# Altium PCB Basic diff probe.PcbDoc
Units mm, origin at the board's own origin, x right, y up, seen from the top; angles counter-clockwise.
Board outline 45 x 23 mm, 2 copper layers (Top Layer, Bottom Layer); 10 components, 13 nets, 32 pads, 1 vias.
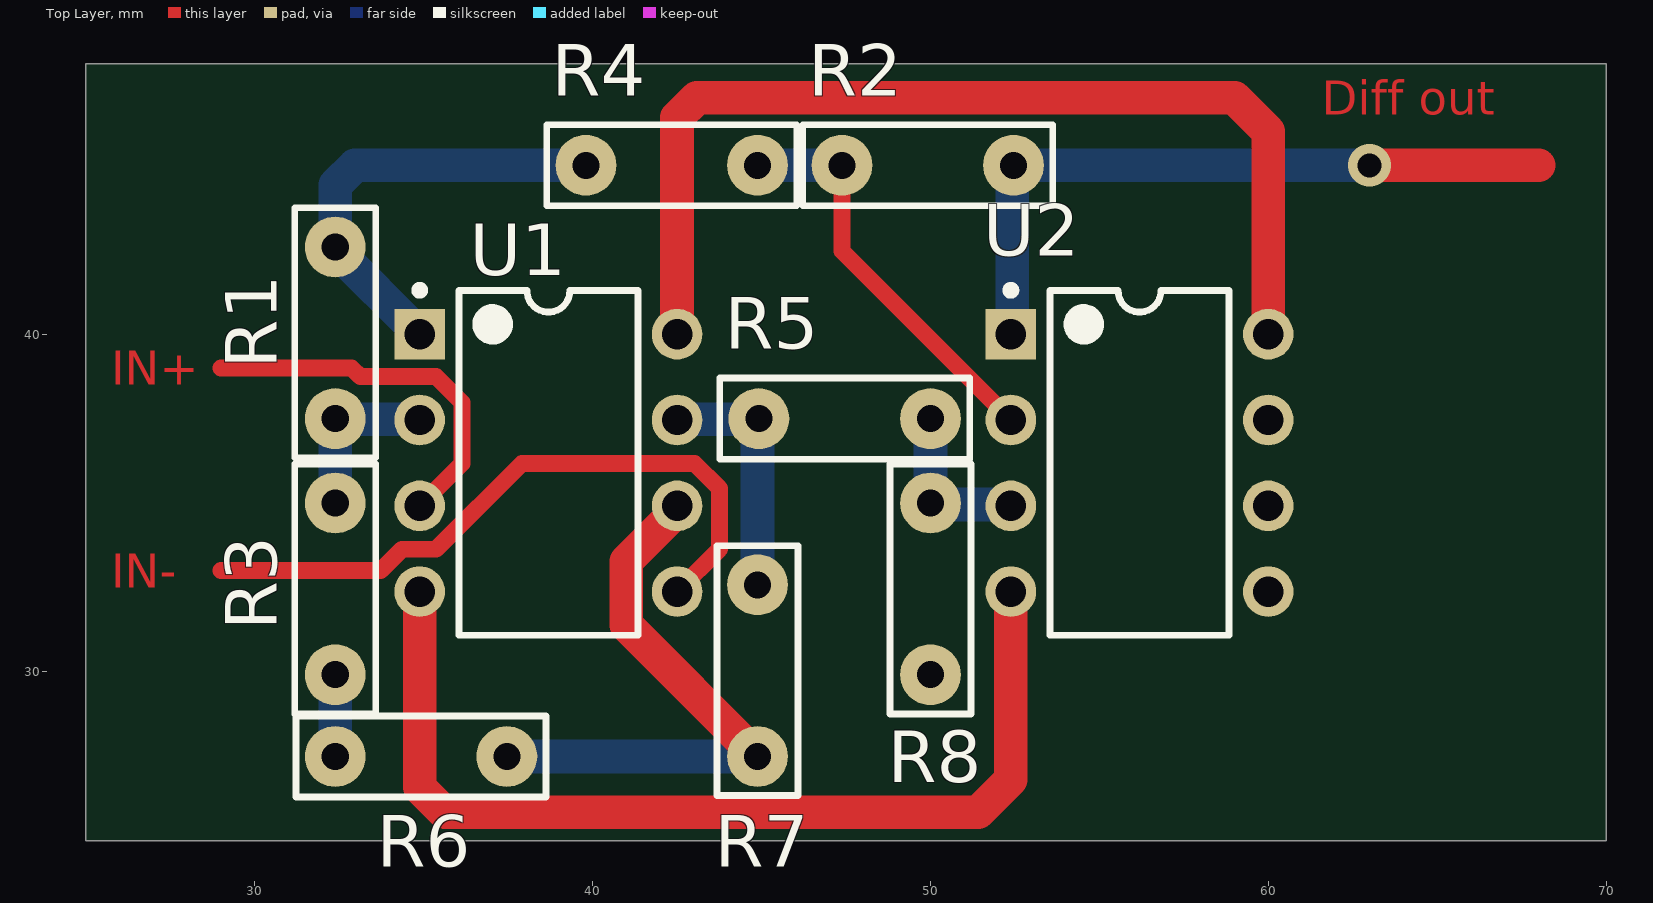
[diagram p0: Top Layer view]
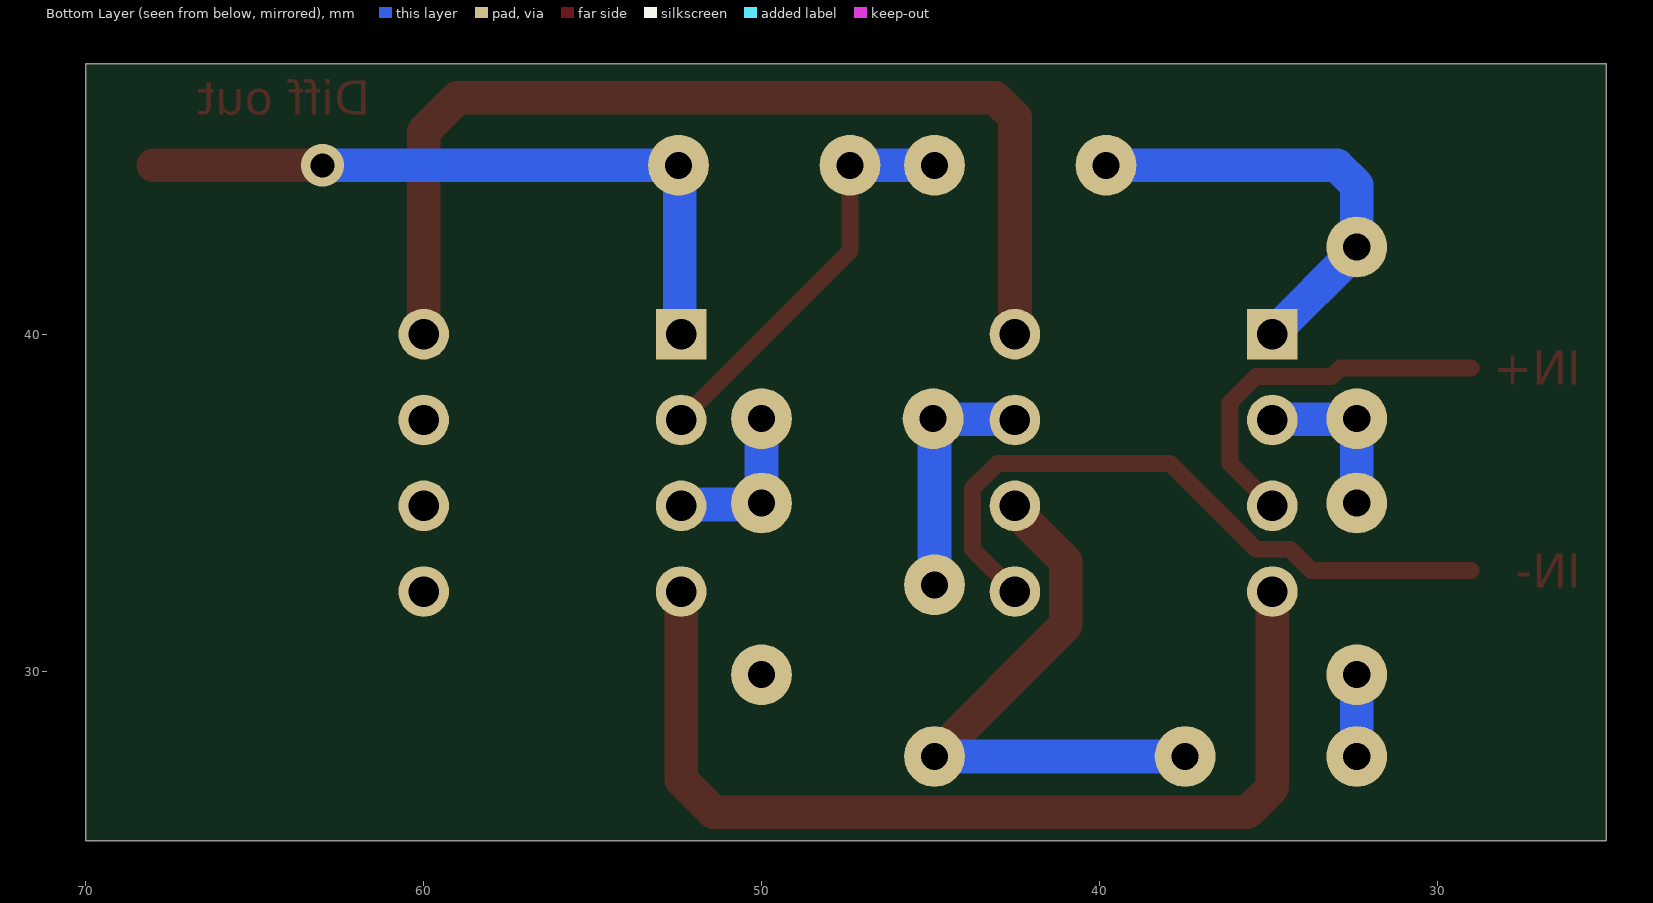
[diagram p1: Bottom Layer view, seen from below]
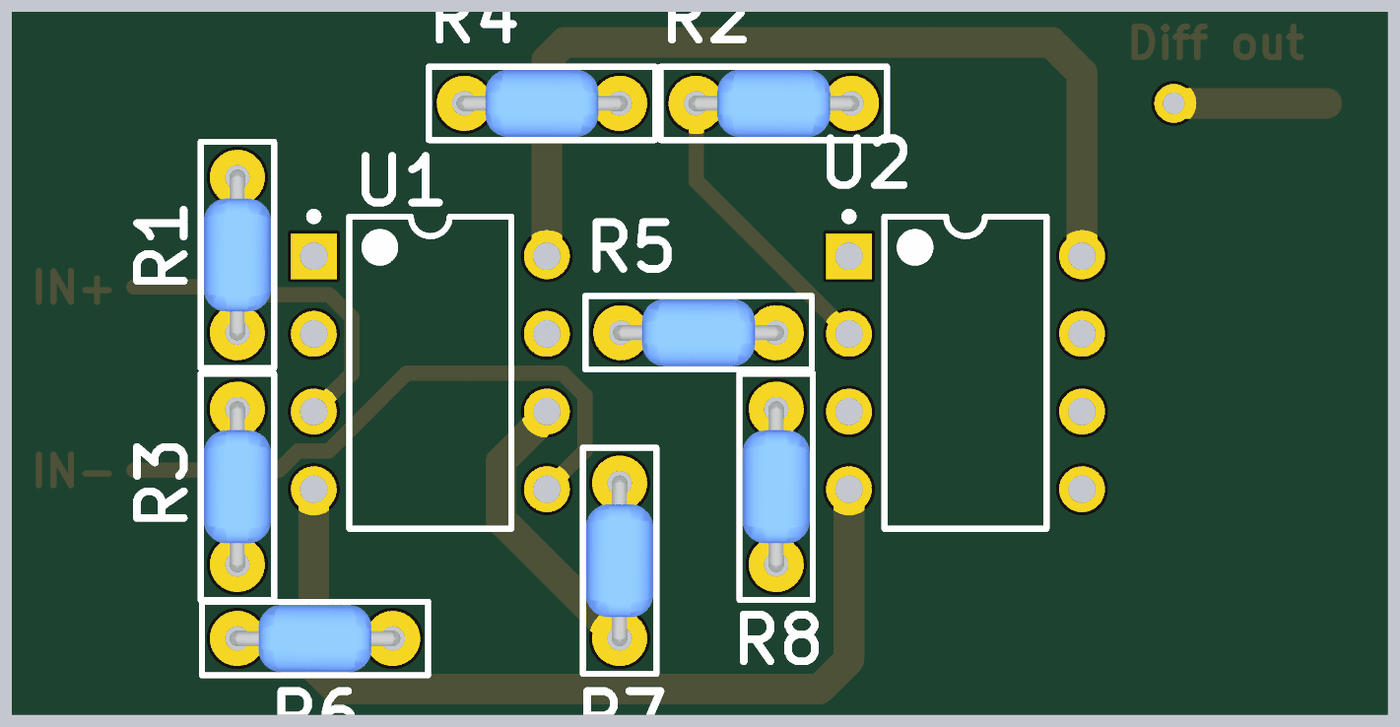
[diagram p2: 3D render of the assembled board from above, using the file's embedded part models]

## Layer stack, top to bottom
Top Solder: solder mask 0.0102, Solder Resist, Dk 3.5
Top Layer: signal copper 0.0356
Dielectric 1: dielectric 0.32, FR-4, Dk 4.8
Bottom Layer: signal copper 0.0356
Bottom Solder: solder mask 0.0102, Solder Resist, Dk 3.5

## Board outline
25,25 70,25 70,48 25,48

## Design rules (kind name [scope] priority, off if disabled: settings)
Clearance [All] p1: gap=0.254 ignorepadtopadclearanceinfootprint=FALSE except(0: Arc-Hole Track-Hole SMDPad-Hole THPad-Hole Via-Hole Fill-Hole Poly-Hole Region-Hole Text-Hole)
PolygonConnect [All] p1: connectstyle=Relief reliefconductorwidth=0.254 reliefentries=4 polygonreliefangle="90 Angle" airgapwidth=0.254
RoutingVias [All] p1: holewidth=0.711 width=1.27 viastyle="Through Hole" minholewidth=0.711 minwidth=1.27 maxholewidth=0.711 maxwidth=1.27
SolderMaskExpansion [All] p1: expansion=0.102 istentingtop=FALSE
Width [All] p1: maxlimit=1 minlimit=0.5 preferedwidth=1
30 further rules are at their usual default settings.

## Components (designator, comment, footprint, x,y, rotation, side; value= is the part's Value field where it differs from the comment)
R1 "10k" C_CERAMIC_TH_P5.08mm 32.38,40.04 r90 top
R2 "3k8" C_CERAMIC_TH_P5.08mm 49.92,45 r0 top
R3 "10k" C_CERAMIC_TH_P5.08mm 32.38,32.46 r90 top
R4 "3k8" C_CERAMIC_TH_P5.08mm 42.34,45 r0 top
R5 "3.8" C_CERAMIC_TH_P5.08mm 47.46,37.5 r0 top
R6 "10k" C_CERAMIC_TH_P5.08mm 34.92,27.5 r180 top
R7 "10k" C_CERAMIC_TH_P5.08mm 44.88,30.04 r90 top
R8 "3k8" C_CERAMIC_TH_P5.08mm 50,32.46 r90 top
U1 "TL072CP" P0008A 38.69,36.19 r0 top
U2 "TL072CP" P0008A 56.19,36.19 r0 top

## Footprints (in the part's own frame and the unit in brackets; to place one, negate y for a bottom-side part, rotate by r counter-clockwise, add the part's x,y. Pads: shape width x height; smd on the part's side, far side on the other; paste and mask are expansions set on the pad)
C_CERAMIC_TH_P5.08mm [mm]
  round 1.8 hole 0.8: 1(-2.54,0) 2(2.54,0)
  silkscreen extent -3.7,-1.2 3.7,1.2, body extent -2.79,-1.11 2.79,1.1, height 6
P0008A [mm] "DIP, 8-Leads, Body 10.15x6.6mm, Pitch 2.54mm"
  rect 1.5x1.5 hole 0.9: 1(-3.81,3.81)
  round 1.5 hole 0.9: 2(-3.81,1.27) 3(-3.81,-1.27) 4(-3.81,-3.81) 5(3.81,-3.81) 6(3.81,-1.27) 7(3.81,1.27) 8(3.81,3.81)
  silkscreen extent -3.93,-5.1 2.65,5.23, body extent -3.95,-5.07 3.95,5.07, height 5.08

## Part data
R1 R2 R3 R4 R5 R6 R7 R8: library part Resistor, "TH, Through Hole"
U1 U2: "IC OPAMP JFET 3MHZ 8DIP", Case/Package=P, Dual Supply Voltage=9V, Input Bias Current=200pA, Input Offset Voltage (Vos)=3mV, Manufacturer="Texas Instruments", Max Dual Supply Voltage=18V, Max I/O Voltage=10mV, Max Operating Temperature=85°C, Min Dual Supply Voltage=3.5V, Min Operating Temperature=-40°C, Nominal Supply Current=5mA, Operating Supply Current=1.4mA, Package Quantity=50, Supplier Part Number 1=595-TL072CP, Voltage Gain=106.02dB, Bandwidth=3MHz, Category="Amplifiers - Op Amps, Buffer, Instrumentation", Common Mode Rejection Ratio=70dB, ComponentLink1Description=https://datasheet.ciiva.com/7709/1764387-7709920.pdf?src-supplier=Element14, ComponentLink1URL=https://datasheet.ciiva.com/7709/1764387-7709920.pdf?src-supplier=Element14, ComponentLink2Description=https://datasheet.ciiva.com/1796/tl071a-1796082.pdf?src-supplier=Digi-Key, ComponentLink2URL=https://datasheet.ciiva.com/1796/tl071a-1796082.pdf?src-supplier=Digi-Key, ComponentLink3Description=https://datasheet.ciiva.com/2974/tl074-2974205.pdf?src-supplier=Avnet, ComponentLink3URL=https://datasheet.ciiva.com/2974/tl074-2974205.pdf?src-supplier=Avnet, Contact Plating=Gold, Gain Bandwidth Product=3MHz, Height=4.57mm, Lead Free="Lead Free", Length=9.81mm, Manufacturer Part Number=TL072CP, Max Supply Voltage=18V, Nominal Gain Bandwidth Product=3MHz, Number of Amplifiers=2, Number of Channels=2, Number of Circuits=2, Number of Elements=2, Number of Pins=8, Packaging=Rail/Tube, Pricing 1="1=1,01000, 10=0,91100, 50=0,86300, 100=0,86300, 1000=0,86300, 10000=0,86300 (USD)", Radiation Hardening=No, REACH SVHC="No SVHC", RoHS=Yes, RoHS Compliant=Yes, Slew Rate=13V/µs, Stock 1=18881, Supplier 1=Mouser, Unity Gain Bandwidth Product=3MHz, Width=6.35mm

## Via types
v1: diameter 1.27, hole 0.711, Top Layer to Bottom Layer, 1 vias

## Nets (pads, with @x,y where several pads share a name; then routed paths per layer and width w, separated by ;. In a path a pad name is that pad's centre, name@x,y a point inside that pad or via, vN(x,y) a via of type N, cw(c..) or ccw(c..) an arc to the next point about the centre after c; other vN are vias at no path point)
DIFF_OUT: R2.2 U2.1 | length 20.6
  Top Layer w1: v1(63,45) 68,45
  Bottom Layer w1: U2.1 52.42,40.04 52.42,44.96 R2.2 v1(63,45)
GND: R8.1
NetR3_1: R3.1 R6.2 | length 2.4
  Bottom Layer w1: R6.2 R3.1
V+_OUT: R5.1 R7.2 U1.7 | length 7.3
  Bottom Layer w1: U1.7 42.52,37.48 44.86,37.48 44.88,37.5 R7.2
V-_OUT: R1.2 R4.1 U1.1 | length 13.1
  Bottom Layer w1: U1.1 32.38,42.5 R1.2 32.38,44.414 32.966,45 R4.1
VCC: U1.8 U2.8 | length 30.6
  Top Layer w1: U1.8 42.5,46.414 43.086,47 59,47 60,46 U2.8
Vdiff+: R5.2 R8.2 U2.3 | length 4.9
  Bottom Layer w1: R5.2 R8.2 50.04,34.96 52.34,34.96 U2.3
Vdiff-: R2.1 R4.2 U2.2 | length 12.1
  Top Layer w0.5: R2.1 47.38,42.46 U2.2
  Bottom Layer w1: R4.2 R2.1
VEE: U1.4 U2.4 | length 29.6
  Top Layer w1: U1.4 34.88,26.586 35.62,25.846 51.414,25.846 52.38,26.812 U2.4
Vin1+: U1.3 | length 11.3
  Top Layer w0.5: 29,39 32.866,39 33.12,38.746 35.367,38.746 36.134,37.979 36.134,36.174 U1.3
  Top Layer w1: U1.3 U1.3@34.88,35.055
Vin1-: R1.1 R3.2 U1.2 | length 5
  Bottom Layer w1: R3.2 R1.1 32.4,37.48 34.86,37.48 U1.2
Vin2+: U1.5 | length 20
  Top Layer w0.5: 29,33 33.727,33 34.361,33.634 35.367,33.634 37.907,36.174 43.019,36.174 43.754,35.439 43.754,33.634 U1.5
Vin2-: R6.1 R7.1 U1.6 | length 17.1
  Top Layer w1: U1.6 42.5,34.785 40.996,33.281 40.996,31.384 R7.1
  Bottom Layer w1: R6.1 R7.1
pads on no net: U2.5 U2.6 U2.7

## Other copper
Top Layer:
  text "Diff out" at 61.584,46.5 h1
  text "IN+" at 25.75,38.5 h1
  text "IN-" at 25.75,32.5 h1